# EAGLE board temp-sensor(v1) (EAGLE 9.6.2)

Size 100 x 80 mm. Coordinates in mm from the lower left corner, seen from the top.
Outline: 0,0 100,0 100,80 0,80 0,0
Copper layers (1*16): Top 0.035mm / dielectric 1.5mm / Bottom 0.035mm
Design rules "default": minimum track width 6mil, minimum drill 0.35mm, track to track 6mil, track to pad 6mil, pad to pad 6mil, via to via 6mil, smd to smd 6mil, copper to edge 40mil, drill to drill 6mil, minimum pad ring 10mil, minimum via ring 8mil, stop-mask expansion 4mil, vias tented up to drill 0mil, thermal gap 10mil

## Footprints (pad centres in the part's own frame; a part is rotated, then mirrored left to right if it is on the bottom)
0603 = smd 1.1 x 1: 1 -0.85,0; 2 0.85,0
0805 = smd 0.8 x 1.2: 1 -0.9,0; 2 0.9,0
SOIC127P602X175-14N = smd 1.545 x 0.65: 1 -2.728,3.81; 2 -2.728,2.54; 3 -2.728,1.27; 4 -2.728,0; 5 -2.728,-1.27; 6 -2.728,-2.54; 7 -2.728,-3.81; 8 2.728,-3.81; 9 2.728,-2.54; 10 2.728,-1.27; 11 2.728,0; 12 2.728,1.27; 13 2.728,2.54; 14 2.728,3.81
SOIC127P599X175-8N = smd 1.97 x 0.6: 1 -2.47,1.905; 2 -2.47,0.635; 3 -2.47,-0.635; 4 -2.47,-1.905; 5 2.47,-1.905; 6 2.47,-0.635; 7 2.47,0.635; 8 2.47,1.905
SOT95P270X145-5N = smd 1.321 x 0.559: 1 -1.372,0.94; 2 -1.372,0; 3 -1.372,-0.94; 4 1.372,-0.94; 5 1.372,0.94
SOT-223_ONS = smd 0.889 x 2.489: 1 -2.4,-2.756; 2 0,-2.756; 3 2.4,-2.756 | smd 3.2 x 2.489: 4 0,2.756
TQFP32-08 = smd 1.27 x 0.559: 1 -4.293,2.8; 2 -4.293,2; 3 -4.293,1.2; 4 -4.293,0.4; 5 -4.293,-0.4; 6 -4.293,-1.2; 7 -4.293,-2; 8 -4.293,-2.8; 17 4.293,-2.8; 18 4.293,-2; 19 4.293,-1.2; 20 4.293,-0.4; 21 4.293,0.4; 22 4.293,1.2; 23 4.293,2; 24 4.293,2.8 | smd 0.559 x 1.27: 9 -2.8,-4.293; 10 -2,-4.293; 11 -1.2,-4.293; 12 -0.4,-4.293; 13 0.4,-4.293; 14 1.2,-4.293; 15 2,-4.293; 16 2.8,-4.293; 25 2.8,4.293; 26 2,4.293; 27 1.2,4.293; 28 0.4,4.293; 29 -0.4,4.293; 30 -1.2,4.293; 31 -2,4.293; 32 -2.8,4.293

## Placement (x,y rotation side)
C1  10nF  [0603]  -49.53,68.58 0 top  (outside the outline)
C2  10nF  [0603]  -53.34,68.58 0 top  (outside the outline)
C3  0.1uF  [0603]  79.42,43.6 90 top
C4  1.0uF  [0603]  50.21,43.92 180 top
C5  0.1uF  [0603]  54.48,41.33 0 top
C6  0.1uF  [0603]  65.33,33.83 270 top
C7  0.1uF  [0603]  63.17,48.11 90 top
C8  0.1uF  [0603]  52.17,48.05 90 top
C9  0.1uF  [0603]  -15.24,78.74 0 top  (outside the outline)
C10  10nF  [0603]  46.49,43.8 270 top
C11  10nF  [0603]  61.51,28.64 90 top
C12  10nF  [0603]  55.01,34.08 90 top
C13  10nF  [0603]  59.26,48.02 90 top
C14  10nF  [0603]  57.24,38.29 270 top
C15  10uF  [0805]  -41.91,68.58 0 top  (outside the outline)
C16  10uF  [0805]  -45.72,68.58 0 top  (outside the outline)
C17  0.1uF  [0603]  -38.1,78.74 0 top  (outside the outline)
C18  0.1uF  [0603]  -41.91,78.74 0 top  (outside the outline)
C19  18pF  [0603]  -45.72,78.74 0 top  (outside the outline)
C20  18pF  [0603]  -49.53,78.74 0 top  (outside the outline)
Q1  300S14-U  [SOIC127P602X175-14N]  74.2,35.35 90 top
Q2  320S14-U  [SOIC127P602X175-14N]  70.69,44.3 0 top
Q3  320S14-U  [SOIC127P602X175-14N]  73.01,53.77 90 top
R1  1k  [0603]  65.84,51.01 180 top
R2  1k  [0603]  64.99,54.65 270 top
R3  1.8k  [0603]  77.26,47.54 90 top
R4  100k  [0603]  64.77,37.51 180 top
R5  200k  [0603]  56.49,28.83 270 top
R6  0  [0603]  55.61,46.74 0 top
R7  5.1k  [0603]  52.55,30.49 0 top
R8  100  [0603]  81.76,36.05 0 top
R9  1k  [0603]  -19.05,82.55 0 top  (outside the outline)
R10  1k  [0603]  -22.86,82.55 0 top  (outside the outline)
R11  5.1k  [0603]  53.33,37.8 0 top
R12  10k  [0603]  49.8,39.98 270 top
R13  0  [0603]  55.54,44.45 180 top
R14  5.1k  [0603]  -38.1,82.55 0 top  (outside the outline)
R15  5.1k  [0603]  -41.91,82.55 0 top  (outside the outline)
R16  100k  [0603]  -45.72,82.55 0 top  (outside the outline)
U1  SE555D  [SOIC127P599X175-8N]  47.64,49.92 270 top
U2  SE555D  [SOIC127P599X175-8N]  -35.56,72.39 0 top  (outside the outline)
U4  MCP6001UT-I/OT  [SOT95P270X145-5N]  83.1,46.82 180 top
U5  MCP6001UT-I/OT  [SOT95P270X145-5N]  59.96,34.04 0 top
U6  MCP6001UT-I/OT  [SOT95P270X145-5N]  87.48,39.96 180 top
U7  MCP6001UT-I/OT  [SOT95P270X145-5N]  61.62,42.71 90 top
U8  NCV4264-2CST50T3G  [SOT-223_ONS]  -30.48,15.24 0 top  (outside the outline)
U9  ATMEGA328P_TQFP  [TQFP32-08]  -46.99,52.07 0 top  (outside the outline)

## Library data of the parts
C1 C2 C10-C14 = SparkFun-Capacitors; PROD_ID: CAP-00867
C3 C5-C9 C17 C18 = SparkFun-Capacitors; PROD_ID: CAP-16503
C4 = SparkFun-Capacitors; PROD_ID: CAP-13930
C15 C16 = SparkFun-Capacitors; PROD_ID: CAP-14259
C19 C20 = SparkFun-Capacitors; PROD_ID: CAP-08267
Q1 = 300S14-U; DESCRIPTION: Bipolar Transistors - BJT 4 NPN Matched Trans. Array SO-14; HEIGHT: 1.75mm; MANUFACTURER_NAME: THAT CORPORATION; MANUFACTURER_PART_NUMBER: 300S14-U; MOUSER_PART_NUMBER: 887-300S14-U; MOUSER_PRICE-STOCK: https://www.mouser.co.uk/ProductDetail/THAT/300S14-U?qs=wN%2Fcur4AVWdHgHcGlLafqA%3D%3D
Q2 Q3 = 320S14-U; DESCRIPTION: Bipolar Transistors - BJT 4 PNP Matched Trans. Array SO-14; HEIGHT: 1.75mm; MANUFACTURER_NAME: THAT CORPORATION; MANUFACTURER_PART_NUMBER: 320S14-U; MOUSER_PART_NUMBER: 887-320S14-U; MOUSER_PRICE-STOCK: https://www.mouser.co.uk/ProductDetail/THAT/320S14-U?qs=9Udfh7QmL4u%252BQY2LzA4HXA%3D%3D
R1 R2 R9 R10 = SparkFun-Resistors; PROD_ID: RES-07856
R3 = SparkFun-Resistors; PROD_ID: RES-09119
R4 R16 = SparkFun-Resistors; PROD_ID: RES-07828
R5 = SparkFun-Resistors; PROD_ID: RES-09385
R6 R13 = SparkFun-Resistors; PROD_ID: RES-08609
R7 R11 R14 R15 = SparkFun-Resistors; PROD_ID: RES-12083
R8 = SparkFun-Resistors; PROD_ID: RES-07863
R12 = SparkFun-Resistors; PROD_ID: RES-00824
U1 U2 = SE555D; AVAILABILITY: In Stock; CHECK_PRICES: https://www.snapeda.com/parts/SE555D/Texas+Instruments/view-part/?ref=eda; DESCRIPTION: Precision timer for -55 to 125C operation; MF: Texas Instruments; MP: SE555D; PACKAGE: SOIC-8 Texas Instruments; PRICE: None; PURCHASE-URL: https://www.snapeda.com/api/url_track_click_mouser/?unipart_id=4805641&manufacturer=Texas Instruments&part_name=SE555D&search_term=se555d; SNAPEDA_LINK: https://www.snapeda.com/parts/SE555D/Texas+Instruments/view-part/?ref=snap
U4-U7 = MCP6001UT-I_OT
U8 = NCV4264-2CST50T3G; COPYRIGHT: Copyright (C) 2024 Ultra Librarian. All rights reserved.; MANUFACTURER_PART_NUMBER: NCV4264-2CST50T3G; MFR_NAME: onsemi
U9 = SparkFun-IC-Microcontroller; PROD_ID: IC-09069

## Nets
3_NPN_DIODE: Q1.1 Q1.2 Q1.6 Q1.7 Q1.8 Q1.9 R8.1
+5V: C3.1 C5.1 C6.1 C7.1 C8.1 C9.1 C15.1 C16.1 C17.1 C18.1 Q2.3 Q2.5 Q2.10 Q2.12 R1.2 R2.2 R14.2 R15.2 R16.2 U1.8 U2.8 U4.5 U5.5 U6.5 U7.5 U8.3 U9.4 U9.6 U9.18
+9V: U8.1
BG_REF_FB: C11.1 R4.1 R5.2 U5.4
CIPO: U9.16
COPI: U9.15
CTAT_BASE: Q3.2 Q3.6 U4.1
CTAT_E1: Q3.3 R2.1
CTAT_E3: Q3.5 R1.1
CTAT_IN+: Q3.7 R3.2 U4.3
FREQ_DIS: R9.2 R10.1 U2.7
FREQ_OUT: U2.3
FREQ_THRES: C2.1 R9.1 U2.2 U2.6
GND: C1.2 C2.2 C3.2 C4.2 C5.2 C6.2 C7.2 C8.2 C9.2 C10.2 C11.2 C12.2 C13.2 C14.2 C15.2 C16.2 C17.2 C18.2 C19.1 C20.1 Q1.3 Q1.5 Q1.10 Q1.12 R3.1 R5.1 R6.1 R7.1 R11.1 U1.1 U2.1 U4.2 U5.2 U6.2 U7.2 U8.2 U8.4 U9.3 U9.5 U9.21
I_BG: C12.1 Q2.1 Q3.1 R7.2 U5.3
I_PTAT: C14.1 Q2.7 R11.2 U7.3
MCU_RST: R16.1 U9.29
N$4: C19.2 U9.7
N$5: C20.2 U9.8
N$6: C1.1 U2.5
N$7: U1.4
N$8: U1.7
N$9: U2.4
PTAT_BASE: Q2.2 Q2.6 Q2.9 Q2.13 U6.1
PTAT_IN+: Q2.14 R8.2 U6.3
PTAT_REF_FB: C13.1 R6.2 R13.1 U7.4
PULSE_OUT: U1.3
PULSE_THRES: C4.1 R12.1 U1.6
SCK: U9.17
SCL: R15.1 U9.28
SDA: R14.1 U9.27
SS: U9.14
TEMP_VBE: Q1.13 Q1.14 Q2.8 Q3.8 U4.4 U6.4
VBG_REF: R4.2 R10.2 R12.2 U5.1
VPTAT_REF: C10.1 R13.2 U1.5 U7.1

## Tracks (layer width: path | path; a pad name or v marks a point on that pad's centre or on a via)
3_NPN_DIODE  (6 unrouted)
+5V  (28 unrouted)
BG_REF_FB  (3 unrouted)
CTAT_BASE  (2 unrouted)
CTAT_E1  (1 unrouted)
CTAT_E3  (1 unrouted)
CTAT_IN+  (2 unrouted)
FREQ_DIS  (2 unrouted)
FREQ_THRES  (3 unrouted)
GND  (39 unrouted)
I_BG  (4 unrouted)
I_PTAT  (3 unrouted)
MCU_RST  (1 unrouted)
N$4  (1 unrouted)
N$5  (1 unrouted)
N$6  (1 unrouted)
PTAT_BASE  (4 unrouted)
PTAT_IN+  (2 unrouted)
PTAT_REF_FB  (3 unrouted)
PULSE_THRES  (2 unrouted)
SCL  (1 unrouted)
SDA  (1 unrouted)
TEMP_VBE  (5 unrouted)
VBG_REF  (3 unrouted)
VPTAT_REF  (3 unrouted)